# EAGLE board Temperature And Humidity Monitor (EAGLE 9.7.0)

Size 147.77 x 136.89 mm. Coordinates in mm from the lower left corner, seen from the top.
Outline: 0,0 147.77,0 147.77,136.89 0,136.89 0,0
Copper layers (1*16): Top 0.035mm / dielectric 1.5mm / Bottom 0.035mm
Design rules "default": minimum track width 6mil, minimum drill 0.35mm, track to track 6mil, track to pad 6mil, pad to pad 6mil, via to via 6mil, smd to smd 6mil, copper to edge 40mil, drill to drill 6mil, minimum pad ring 10mil, minimum via ring 8mil, stop-mask expansion 4mil, vias tented up to drill 0mil, thermal gap 10mil

## Footprints (pad centres in the part's own frame; a part is rotated, then mirrored left to right if it is on the bottom)
LEDRD254W60D565H860B_G = drill 0.981 pad 1.581: 1 -1.27,0; 2 1.27,0
LEDRD254W60D565H860B = drill 0.981 pad 1.581: 1 -1.27,0; 2 1.27,0
RESAD1016W63L850D250B = drill 0.83 pad 1.43: 1 -5.08,0; 2 5.08,0
HA-06-SM065 = drill 1 pad 1.676: 1 -2.54,-2.54; 2 0,2.54; 3 2.54,-2.54
ARDUINO-UNO-R3-SHIELD = drill 1.016 pad 1.88: 3.3V 24.13,-2.54; 5V 24.13,0; A0 24.13,12.7; A1 24.13,15.24; A2 24.13,17.78; A3 24.13,20.32; A4 24.13,22.86; A5 24.13,25.4; AREF -24.13,-13.97; D2 -24.13,20.32; D3 -24.13,17.78; D4 -24.13,15.24; D5 -24.13,12.7; D6 -24.13,10.16; D7 -24.13,7.62; D8 -24.13,3.81; D9 -24.13,1.27; D10 -24.13,-1.27; D11 -24.13,-3.81; D12 -24.13,-6.35; D13 -24.13,-8.89; GND@0 24.13,2.54; GND@1 24.13,5.08; GND@2 -24.13,-11.43; IOREF 24.13,-7.62; NC 24.13,-10.16; RES 24.13,-5.08; RX -24.13,25.4; SCL -24.13,-19.05; SDA -24.13,-16.51; TX -24.13,22.86; VIN 24.13,7.62
TO92 = drill 0.813 octagon: 1 -1.27,0; 2 0,1.905; 3 1.27,0
JHD-162A = drill 1.016 long: 1 -19.05,0; 2 -16.51,0; 3 -13.97,0; 4 -11.43,0; 5 -8.89,0; 6 -6.35,0; 7 -3.81,0; 8 -1.27,0; 9 1.27,0; 10 3.81,0; 11 6.35,0; 12 8.89,0; 13 11.43,0; 14 13.97,0; 15 16.51,0; 16 19.05,0

## Placement (x,y rotation side)
D1  GREEN  [LEDRD254W60D565H860B_G]  140.17,106.99 180 top
D2  RED  [LEDRD254W60D565H860B]  126.19,43.53 180 top
R1  220  [RESAD1016W63L850D250B]  141.44,101.91 90 top
R2  220  [RESAD1016W63L850D250B]  127.46,38.45 90 top
R3  10k  [RESAD1016W63L850D250B]  49.78,69.52 90 top
RPOTPOTENTIOMETER  10k  [HA-06-SM065]  107.42,38.95 0 top
UARDUINO_UNO  ARDUINO-UNO-R3-SHIELD  [ARDUINO-UNO-R3-SHIELD]  87.13,107.05 270 top
UDHT11!  TMP36GT9Z_TO92  [TO92]  128.94,86.12 0 top
ULCD_16*2  LCD-16X2JHD-162A  [JHD-162A]  30.73,36.63 0 top

## Library data of the parts
D1 = Tinkercad; CATEGORY: Opto-Electronic; SUB-CATEGORY: LED; VALUE: LED_GREEN
D2 = Tinkercad; CATEGORY: Opto-Electronic; SUB-CATEGORY: LED; VALUE: LED_RED
R1-R3 RPOTPOTENTIOMETER UARDUINO_UNO UDHT11! ULCD_16*2 = Tinkercad

## Nets
D1_A: D1.1 R1.2
D2_A: D2.1 R2.2
UARDUINO_UNO_5V: R1.1 RPOTPOTENTIOMETER.1 UARDUINO_UNO.5V UDHT11!.3 ULCD_16*2.2 ULCD_16*2.15
UARDUINO_UNO_A0: UARDUINO_UNO.A0 UDHT11!.2
UARDUINO_UNO_D2: UARDUINO_UNO.D2 ULCD_16*2.14
UARDUINO_UNO_D3: UARDUINO_UNO.D3 ULCD_16*2.13
UARDUINO_UNO_D4: UARDUINO_UNO.D4 ULCD_16*2.12
UARDUINO_UNO_D5: UARDUINO_UNO.D5 ULCD_16*2.11
UARDUINO_UNO_D11: UARDUINO_UNO.D11 ULCD_16*2.6
UARDUINO_UNO_D12: UARDUINO_UNO.D12 ULCD_16*2.4
UARDUINO_UNO_GND: D1.2 D2.2 R3.2 RPOTPOTENTIOMETER.3 UARDUINO_UNO.GND@0 UARDUINO_UNO.GND@1 UARDUINO_UNO.GND@2 UDHT11!.1 ULCD_16*2.1 ULCD_16*2.5
ULCD_16*2_LED-: R3.1 ULCD_16*2.16
ULCD_16*2_VO: R2.1 RPOTPOTENTIOMETER.2 ULCD_16*2.3

## Tracks (layer width: path | path; a pad name or v marks a point on that pad's centre or on a via)
D1_A  (1 unrouted)
D2_A  (1 unrouted)
UARDUINO_UNO_5V  (5 unrouted)
UARDUINO_UNO_A0  (1 unrouted)
UARDUINO_UNO_D2  (1 unrouted)
UARDUINO_UNO_D3  (1 unrouted)
UARDUINO_UNO_D4  (1 unrouted)
UARDUINO_UNO_D5  (1 unrouted)
UARDUINO_UNO_D11  (1 unrouted)
UARDUINO_UNO_D12  (1 unrouted)
UARDUINO_UNO_GND  (9 unrouted)
ULCD_16*2_LED-  (1 unrouted)
ULCD_16*2_VO  (2 unrouted)